# EAGLE board cert3d_rev2_rounded (EAGLE 9.4.1)
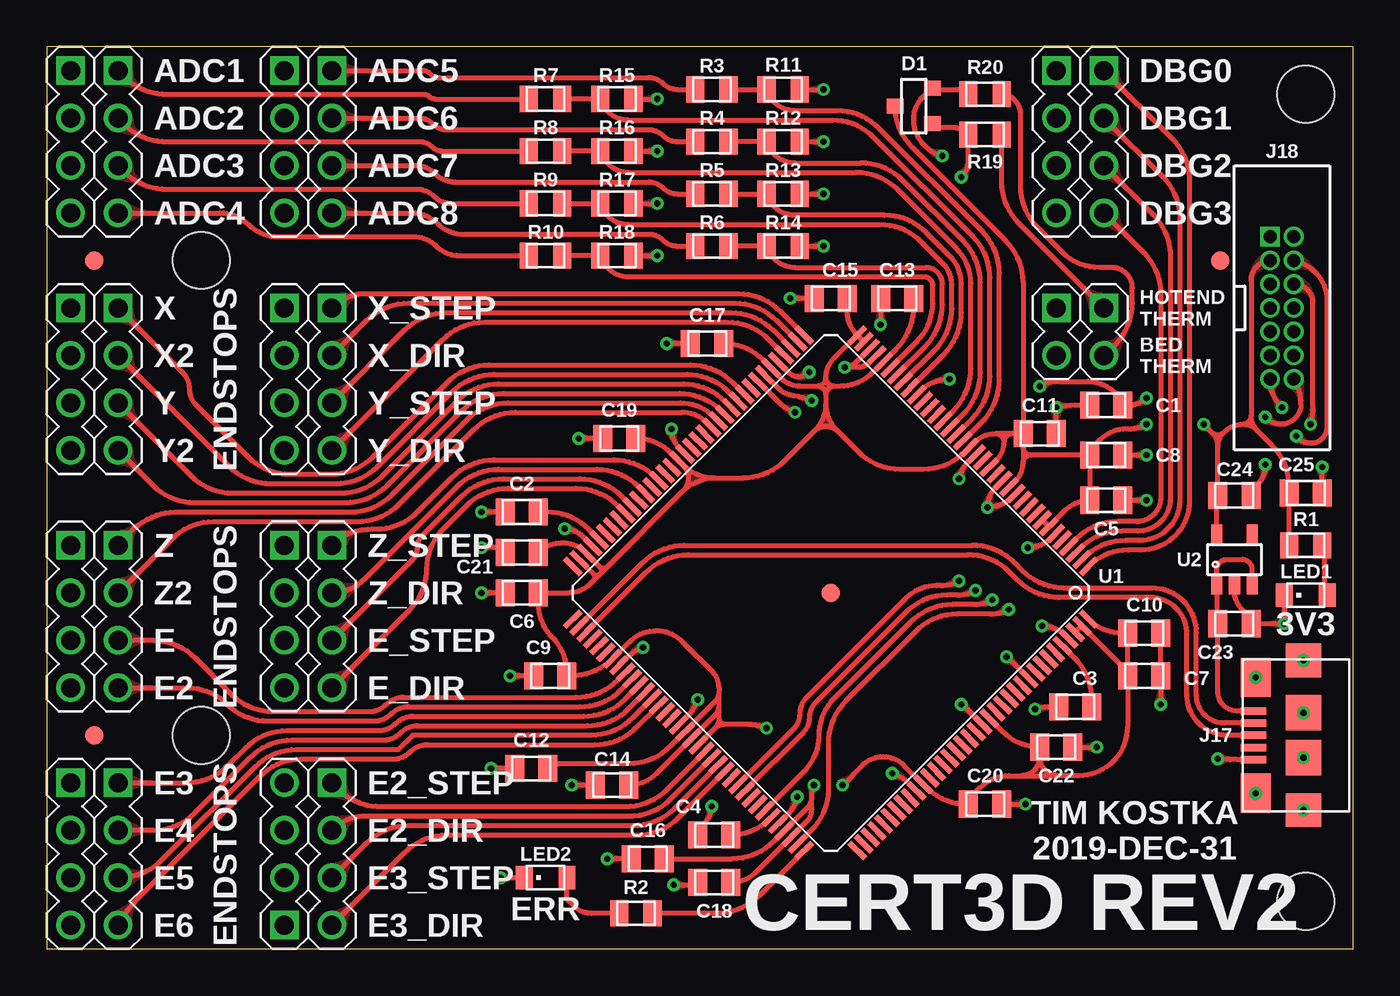
[diagram p0: board, top side]
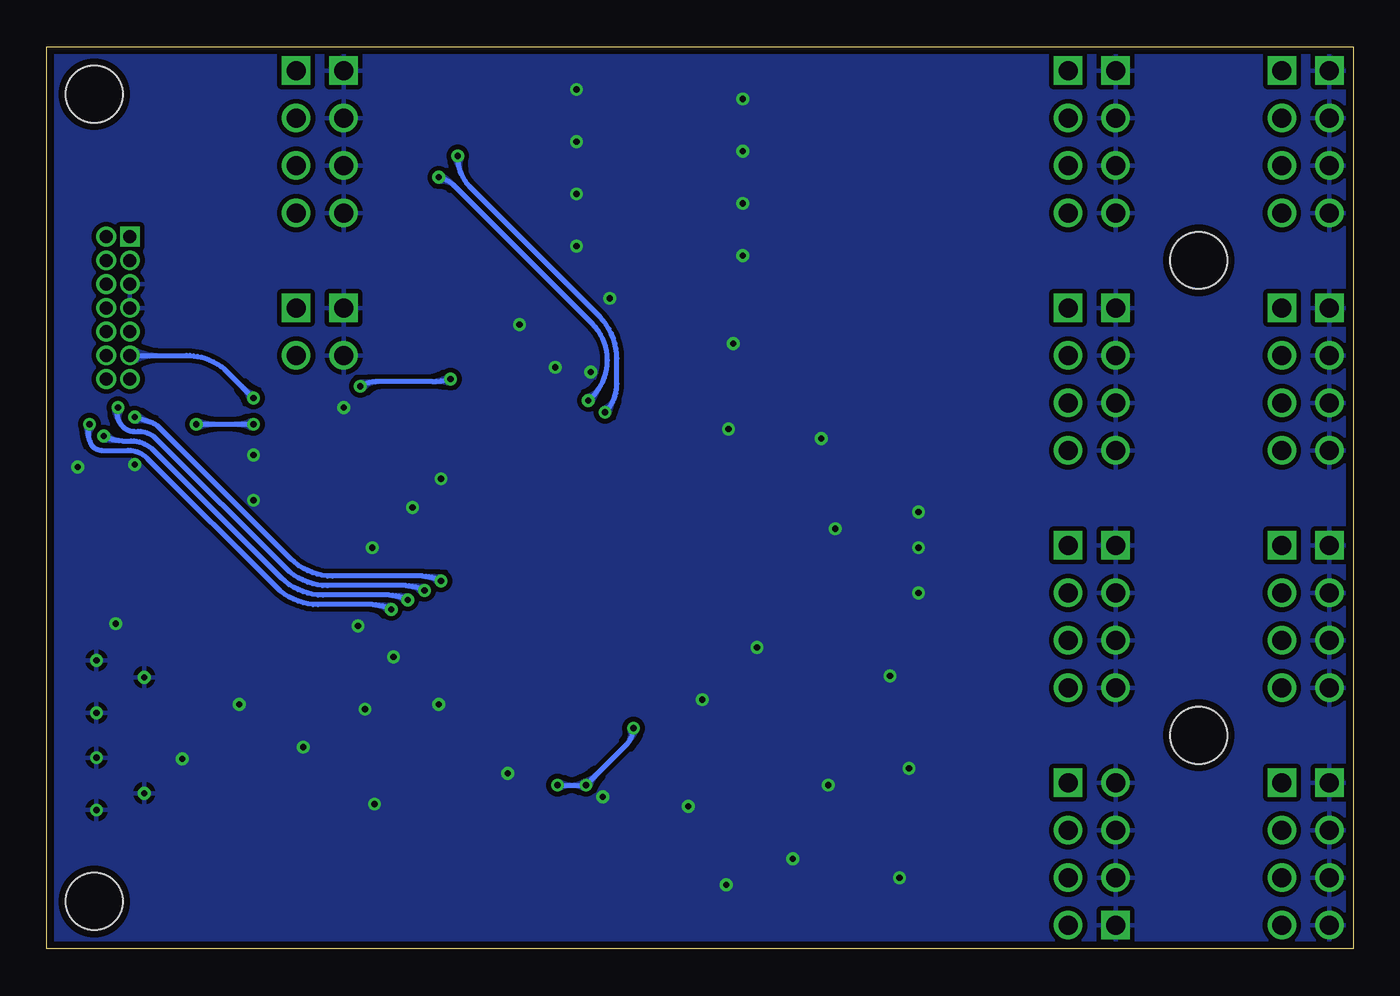
[diagram p1: board, bottom side, seen from below]

Size 69.85 x 48.26 mm. Coordinates in mm from the lower left corner, seen from the top.
Outline: 0,0 69.85,0 69.85,48.26 0,48.26 0,0
Copper layers (1*16): Top 0.0356mm / dielectric 1.5011mm / Bottom 0.0356mm
Design rules "oshpark-2layer *": minimum track width 6mil, minimum drill 13mil, track to track 6mil, track to pad 6mil, pad to pad 6mil, via to via 6mil, smd to smd 6mil, copper to edge 15mil, drill to drill 6mil, minimum pad ring 7mil, minimum via ring 7mil, stop-mask expansion 4mil, vias tented up to drill 13mil, thermal gap 10mil
Net classes: 0 default: width 0.254 mm
Holes 3.05 mm at 8.26,36.83 8.26,11.43 67.31,2.54 67.31,45.72

## Footprints (pad centres in the part's own frame; a part is rotated, then mirrored left to right if it is on the bottom)
C0805-5MIL = smd 1.016 x 1.448: 1 -0.889,0; 2 0.889,0
SOT23-3 = smd 0.9 x 0.8: 1 -1,0.95; 2 -1,-0.95; 3 1,0
FID1MM = smd 1 x 1: 1 0,0
SAM-TSW-104-XX-X-S = drill 1.016 square: 1 -3.81,0 | drill 1.016: 2 -1.27,0; 3 1.27,0; 4 3.81,0
HIR-ZX62R-B-5P-VIAS = smd 0.4 x 1.35: 1 -1.3,0; 2 -0.65,0; 3 0,0; 4 0.65,0; 5 1.3,0 | smd 2.1 x 1.6: PAD@1 3.1,0.125; PAD@2 -3.1,0.125 | smd 1.8 x 1.9: PAD@3 4,2.675; PAD@4 -4,2.675 | smd 1.9 x 1.9: PAD@5 1.2,2.675; PAD@6 -1.2,2.675 | drill 0.33: PAD@7 -3.1,0.125; PAD@8 -4,2.675; PAD@9 -1.2,2.675; PAD@10 1.2,2.675; PAD@11 4,2.675; PAD@12 3.1,0.125
CNC-3220-14-0100-00 = drill 0.7 square: 1 -0.635,3.81 | drill 0.7: 2 0.635,3.81; 3 -0.635,2.54; 4 0.635,2.54; 5 -0.635,1.27; 6 0.635,1.27; 7 -0.635,0; 8 0.635,0; 9 -0.635,-1.27; 10 0.635,-1.27; 11 -0.635,-2.54; 12 0.635,-2.54; 13 -0.635,-3.81; 14 0.635,-3.81
SAM-TSW-102-XX-X-S = drill 1.016 square: 1 -1.27,0 | drill 1.016: 2 1.27,0
CHIPLED0805-SMALL = smd 0.9 x 1.25: A 1.143,0; C -1.143,0
RES0805R-5MIL = smd 0.965 x 1.4: 1 -0.889,0; 2 0.889,0
LQFP144-20X20MM = smd 1.2 x 0.3: 1 -10.75,8.75; 2 -10.75,8.25; 3 -10.75,7.75; 4 -10.75,7.25; 5 -10.75,6.75; 6 -10.75,6.25; 7 -10.75,5.75; 8 -10.75,5.25; 9 -10.75,4.75; 10 -10.75,4.25; 11 -10.75,3.75; 12 -10.75,3.25; 13 -10.75,2.75; 14 -10.75,2.25; 15 -10.75,1.75; 16 -10.75,1.25; 17 -10.75,0.75; 18 -10.75,0.25; 19 -10.75,-0.25; 20 -10.75,-0.75; 21 -10.75,-1.25; 22 -10.75,-1.75; 23 -10.75,-2.25; 24 -10.75,-2.75; 25 -10.75,-3.25; 26 -10.75,-3.75; 27 -10.75,-4.25; 28 -10.75,-4.75; 29 -10.75,-5.25; 30 -10.75,-5.75; 31 -10.75,-6.25; 32 -10.75,-6.75; 33 -10.75,-7.25; 34 -10.75,-7.75; 35 -10.75,-8.25; 36 -10.75,-8.75; 73 10.75,-8.75; 74 10.75,-8.25; 75 10.75,-7.75; 76 10.75,-7.25; 77 10.75,-6.75; 78 10.75,-6.25; 79 10.75,-5.75; 80 10.75,-5.25; 81 10.75,-4.75; 82 10.75,-4.25; 83 10.75,-3.75; 84 10.75,-3.25; 85 10.75,-2.75; 86 10.75,-2.25; 87 10.75,-1.75; 88 10.75,-1.25; 89 10.75,-0.75; 90 10.75,-0.25; 91 10.75,0.25; 92 10.75,0.75; 93 10.75,1.25; 94 10.75,1.75; 95 10.75,2.25; 96 10.75,2.75; 97 10.75,3.25; 98 10.75,3.75; 99 10.75,4.25; 100 10.75,4.75; 101 10.75,5.25; 102 10.75,5.75; 103 10.75,6.25; 104 10.75,6.75; 105 10.75,7.25; 106 10.75,7.75; 107 10.75,8.25; 108 10.75,8.75 | smd 0.3 x 1.2: 37 -8.75,-10.75; 38 -8.25,-10.75; 39 -7.75,-10.75; 40 -7.25,-10.75; 41 -6.75,-10.75; 42 -6.25,-10.75; 43 -5.75,-10.75; 44 -5.25,-10.75; 45 -4.75,-10.75; 46 -4.25,-10.75; 47 -3.75,-10.75; 48 -3.25,-10.75; 49 -2.75,-10.75; 50 -2.25,-10.75; 51 -1.75,-10.75; 52 -1.25,-10.75; 53 -0.75,-10.75; 54 -0.25,-10.75; 55 0.25,-10.75; 56 0.75,-10.75; 57 1.25,-10.75; 58 1.75,-10.75; 59 2.25,-10.75; 60 2.75,-10.75; 61 3.25,-10.75; 62 3.75,-10.75; 63 4.25,-10.75; 64 4.75,-10.75; 65 5.25,-10.75; 66 5.75,-10.75; 67 6.25,-10.75; 68 6.75,-10.75; 69 7.25,-10.75; 70 7.75,-10.75; 71 8.25,-10.75; 72 8.75,-10.75; 109 8.75,10.75; 110 8.25,10.75; 111 7.75,10.75; 112 7.25,10.75; 113 6.75,10.75; 114 6.25,10.75; 115 5.75,10.75; 116 5.25,10.75; 117 4.75,10.75; 118 4.25,10.75; 119 3.75,10.75; 120 3.25,10.75; 121 2.75,10.75; 122 2.25,10.75; 123 1.75,10.75; 124 1.25,10.75; 125 0.75,10.75; 126 0.25,10.75; 127 -0.25,10.75; 128 -0.75,10.75; 129 -1.25,10.75; 130 -1.75,10.75; 131 -2.25,10.75; 132 -2.75,10.75; 133 -3.25,10.75; 134 -3.75,10.75; 135 -4.25,10.75; 136 -4.75,10.75; 137 -5.25,10.75; 138 -5.75,10.75; 139 -6.25,10.75; 140 -6.75,10.75; 141 -7.25,10.75; 142 -7.75,10.75; 143 -8.25,10.75; 144 -8.75,10.75
SOT23-5 = smd 1.05 x 0.6: 1 -1.35,0.95; 2 -1.35,0; 3 -1.35,-0.95; 4 1.35,-0.95; 5 1.35,0.95

## Placement (x,y rotation side)
C1  0.1uF  [C0805-5MIL]  56.64,29.08 180 top
C2  2.2uF  [C0805-5MIL]  25.4,23.37 180 top
C3  2.2uF  [C0805-5MIL]  54.99,12.95 180 top
C4  2.2uF  [C0805-5MIL]  35.69,6.1 180 top
C5  0.1uF  [C0805-5MIL]  56.64,24 0 top
C6  0.1uF  [C0805-5MIL]  25.4,19.05 180 top
C7  0.1uF  [C0805-5MIL]  58.67,14.61 0 top
C8  0.1uF  [C0805-5MIL]  56.64,26.42 0 top
C9  0.1uF  [C0805-5MIL]  26.92,14.61 180 top
C10  0.1uF  [C0805-5MIL]  58.67,16.89 0 top
C11  0.1uF  [C0805-5MIL]  53.09,27.56 0 top
C12  0.1uF  [C0805-5MIL]  25.91,9.65 180 top
C13  0.1uF  [C0805-5MIL]  45.47,34.8 180 top
C14  0.1uF  [C0805-5MIL]  30.23,8.76 180 top
C15  0.1uF  [C0805-5MIL]  41.91,34.8 180 top
C16  0.1uF  [C0805-5MIL]  32.13,4.83 180 top
C17  0.1uF  [C0805-5MIL]  35.31,32.38 180 top
C18  0.1uF  [C0805-5MIL]  35.69,3.56 180 top
C19  0.1uF  [C0805-5MIL]  30.61,27.3 180 top
C20  0.1uF  [C0805-5MIL]  50.16,7.75 0 top
C21  0.1uF  [C0805-5MIL]  25.4,21.21 180 top
C22  0.1uF  [C0805-5MIL]  53.98,10.79 0 top
C23  2.2uF  [C0805-5MIL]  63.5,17.4 0 top
C24  2.2uF  [C0805-5MIL]  63.5,24.26 0 top
C25  0.1uF  [C0805-5MIL]  67.31,24.38 0 top
D1  SCHOTTKY_DUAL_CCBAT54C  [SOT23-3]  46.35,45.09 180 top
FD1  FIDUCIAL  [FID1MM]  2.54,36.83 0 top
FD2  FIDUCIAL  [FID1MM]  41.91,19.05 0 top
FD3  FIDUCIAL  [FID1MM]  62.74,36.83 0 top
FD4  FIDUCIAL  [FID1MM]  2.54,11.43 0 top
J1  CONN4TSW-S  [SAM-TSW-104-XX-X-S]  3.81,30.48 270 top
J2  CONN4TSW-S  [SAM-TSW-104-XX-X-S]  3.81,17.78 270 top
J3  CONN4TSW-S  [SAM-TSW-104-XX-X-S]  3.81,5.08 270 top
J4  CONN4TSW-S  [SAM-TSW-104-XX-X-S]  1.27,30.48 270 top
J5  CONN4TSW-S  [SAM-TSW-104-XX-X-S]  1.27,17.78 270 top
J6  CONN4TSW-S  [SAM-TSW-104-XX-X-S]  1.27,5.08 270 top
J7  CONN4TSW-S  [SAM-TSW-104-XX-X-S]  15.24,43.18 270 top
J8  CONN4TSW-S  [SAM-TSW-104-XX-X-S]  3.81,43.18 270 top
J9  CONN4TSW-S  [SAM-TSW-104-XX-X-S]  15.24,17.78 270 top
J10  CONN4TSW-S  [SAM-TSW-104-XX-X-S]  15.24,30.48 270 top
J11  CONN4TSW-S  [SAM-TSW-104-XX-X-S]  15.24,5.08 270 top
J12  CONN4TSW-S  [SAM-TSW-104-XX-X-S]  1.27,43.18 270 top
J13  CONN4TSW-S  [SAM-TSW-104-XX-X-S]  12.7,43.18 270 top
J14  CONN4TSW-S  [SAM-TSW-104-XX-X-S]  12.7,17.78 270 top
J15  CONN4TSW-S  [SAM-TSW-104-XX-X-S]  12.7,30.48 270 top
J16  CONN4TSW-S  [SAM-TSW-104-XX-X-S]  12.7,5.08 90 top
J17  USB-5PINTOPVIA  [HIR-ZX62R-B-5P-VIAS]  64.52,11.43 270 top
J18  STLINK-V3/SWDCNC-3220  [CNC-3220-14-0100-00]  66.04,34.29 0 top
J19  CONN2TSW-S  [SAM-TSW-102-XX-X-S]  56.52,33.02 270 top
J20  CONN2TSW-S  [SAM-TSW-102-XX-X-S]  53.98,33.02 270 top
J21  CONN4TSW-S  [SAM-TSW-104-XX-X-S]  56.52,43.18 270 top
J22  CONN4TSW-S  [SAM-TSW-104-XX-X-S]  53.98,43.18 270 top
LED1  GRN  [CHIPLED0805-SMALL]  67.31,18.92 0 top
LED2  RED  [CHIPLED0805-SMALL]  26.67,3.81 0 top
R1  100K  [RES0805R-5MIL]  67.31,21.59 0 top
R2  10K  [RES0805R-5MIL]  31.5,1.91 180 top
R3  7.5K  [RES0805R-5MIL]  35.56,45.97 180 top
R4  7.5K  [RES0805R-5MIL]  35.56,43.18 180 top
R5  7.5K  [RES0805R-5MIL]  35.56,40.39 180 top
R6  7.5K  [RES0805R-5MIL]  35.56,37.59 180 top
R7  7.5K  [RES0805R-5MIL]  26.67,45.47 180 top
R8  7.5K  [RES0805R-5MIL]  26.67,42.67 180 top
R9  7.5K  [RES0805R-5MIL]  26.67,39.88 180 top
R10  7.5K  [RES0805R-5MIL]  26.67,37.08 180 top
R11  1.0K  [RES0805R-5MIL]  39.37,45.97 0 top
R12  1.0K  [RES0805R-5MIL]  39.37,43.18 0 top
R13  1.0K  [RES0805R-5MIL]  39.37,40.39 0 top
R14  1.0K  [RES0805R-5MIL]  39.37,37.59 0 top
R15  1.0K  [RES0805R-5MIL]  30.48,45.47 0 top
R16  1.0K  [RES0805R-5MIL]  30.48,42.67 0 top
R17  1.0K  [RES0805R-5MIL]  30.48,39.88 0 top
R18  1.0K  [RES0805R-5MIL]  30.48,37.08 0 top
R19  100  [RES0805R-5MIL]  50.16,43.56 0 top
R20  100  [RES0805R-5MIL]  50.16,45.72 0 top
U1  STM32H745-144  [LQFP144-20X20MM]  41.91,19.05 225 top
U2  MIC5219  [SOT23-5]  63.5,20.83 90 top

## Library data of the parts
C1 C5-C22 C25 = kcl_passives; PN: C0805C104K5RACTU
C2-C4 = kcl_passives; PN: C0805C225K3RAC7800
C23 C24 = kcl_passives; PN: C0805C225K8RACTU
D1 = kcl_passives; PN: BAT54CLT1G
FD1-FD4 = kcl_extra; PN: DNI
J1-J16 J21 J22 = kcl_connectors_auto; PN: TSW-104-07-F-S
J17 = kcl_connectors; PN: ZX62R-B-5P(30)
J18 = kcl_connectors; PN: 3220-14-0100-00
J19 J20 = kcl_connectors_auto; PN: TSW-102-07-F-S
LED1 = kcl_passives; PN: 150080GS75000
LED2 = kcl_passives; PN: 150080RS75000
R1 = kcl_passives; PN: CRCW0805100KFKEA
R2 = kcl_passives; PN: CRCW080510K0FKEA
R3-R10 = kcl_passives; PN: CRCW08057K50FKEA
R11-R18 = kcl_passives; PN: CRCW08051K00FKEA
R19 R20 = kcl_passives; PN: CRCW0805100RFKEA
U1 = kcl_ics
U2 = kcl_ics; PN: MIC5323-3.3YD5-TR

## Nets
+3V3: C5.1 C6.1 C7.1 C8.1 C9.1 C10.1 C11.1 C12.1 C13.1 C14.1 C15.1 C16.1 C17.1 C18.1 C19.1 C20.1 C21.1 C22.1 C24.1 C25.1 D1.3 J18.3 R1.1 U1.7 U1.8 U1.13 U1.16 U1.19 U1.32 U1.35 U1.36 U1.42 U1.56 U1.70 U1.71 U1.79 U1.90 U1.91 U1.92 U1.105 U1.106 U1.119 U1.129 U1.142 U1.143 U1.144 U2.5
ADC3_INP0: R6.1 R14.1 U1.30
ADC3_INP1: R10.1 R18.1 U1.31
ADC3_INP2: R8.1 R16.1 U1.23
ADC3_INP3: R7.1 R15.1 U1.21
ADC3_INP7: R4.1 R12.1 U1.22
ADC3_INP8: R3.1 R11.1 U1.20
ADC3_INP10: R5.1 R13.1 U1.28
ADC3_INP11: R9.1 R17.1 U1.29
DAC1_OUT1: D1.1 R19.1 U1.43
DAC1_OUT2: D1.2 R20.1 U1.44
DEBUG0: J21.1 U1.1
DEBUG1: J21.2 U1.2
DEBUG2: J21.3 U1.3
DEBUG3: J21.4 U1.4
E2_STOP: J2.4 U1.82
E3_STOP: J3.1 U1.83
E4_STOP: J3.2 U1.84
E5_STOP: J3.3 U1.85
E6_STOP: J3.4 U1.86
E_STOP: J2.3 U1.81
GND: C1.2 C2.2 C3.2 C4.2 C5.2 C6.2 C7.2 C8.2 C9.2 C10.2 C11.2 C12.2 C13.2 C14.2 C15.2 C16.2 C17.2 C18.2 C19.2 C20.2 C21.2 C22.2 C23.2 C24.2 C25.2 J4.1 J4.2 J4.3 J4.4 J5.1 J5.2 J5.3 J5.4 J6.1 J6.2 J6.3 J6.4 J12.1 J12.2 J12.3 J12.4 J13.1 J13.2 J13.3 J13.4 J14.1 J14.2 J14.3 J14.4 J15.1 J15.2 J15.3 J15.4 J16.1 J16.2 J16.3 J16.4 J17.5 J17.PAD@1 J17.PAD@2 J17.PAD@3 J17.PAD@4 J17.PAD@5 J17.PAD@6 J17.PAD@7 J17.PAD@8 J17.PAD@9 J17.PAD@10 J17.PAD@11 J17.PAD@12 J18.5 J18.7 J20.1 J20.2 J22.1 J22.2 J22.3 J22.4 LED1.C LED2.C R11.2 R12.2 R13.2 R14.2 R15.2 R16.2 R17.2 R18.2 U1.6 U1.12 U1.14 U1.18 U1.33 U1.34 U1.41 U1.55 U1.69 U1.80 U1.89 U1.104 U1.118 U1.128 U1.135 U1.141 U2.2
LED_ERR: R2.1 U1.108
N$1: C2.1 U1.68
N$2: C4.1 U1.103
N$3: J7.3 R5.2
N$5: J7.1 R3.2
N$6: J8.2 R8.2
N$7: J7.2 R4.2
N$9: C3.1 U1.140
N$10: C23.1 J17.1 U2.1 U2.3
N$13: J8.3 R9.2
N$14: J7.4 R6.2
N$15: J8.4 R10.2
N$16: J8.1 R7.2
N$23: LED2.A R2.2
N$24: LED1.A R1.2
NRST: C1.1 J18.11 U1.27
SWCLK: J18.6 U1.107
SWDIO: J18.4 U1.102
THERM_BED: J19.2 R20.2
THERM_HOT_END: J19.1 R19.2
TIM1_CH1: J9.1 U1.59
TIM1_CH2: J9.2 U1.61
TIM1_CH3: J9.3 U1.63
TIM1_CH4: J9.4 U1.64
TIM2_CH1: J10.1 U1.37
TIM2_CH2: J10.2 U1.38
TIM2_CH3: J10.3 U1.39
TIM2_CH4: J10.4 U1.40
TIM3_CH1: J11.1 U1.93
TIM3_CH2: J11.2 U1.94
TIM3_CH3: J11.3 U1.95
TIM3_CH4: J11.4 U1.96
USART1_RX: J18.13 U1.99
USART1_TX: J18.14 U1.98
USB_HS_DM: J17.2 U1.74
USB_HS_DP: J17.3 U1.75
X2_STOP: J1.2 U1.47
X_STOP: J1.1 U1.46
Y2_STOP: J1.4 U1.49
Y_STOP: J1.3 U1.48
Z2_STOP: J2.2 U1.51
Z_STOP: J2.1 U1.50

## Tracks (layer width: path | path; a pad name or v marks a point on that pad's centre or on a via)
+3V3  (via drill 0.33)
  Top 0.254: 62.28,27.64 v61.85,28.07 | v42.55,8.76 43.61,9.83 arc-45 44.72,10.29 arc-45 45.83,9.83 U1.119 46.99,8.67 arc45 49.21,7.75 C20.1 arc-45 49.46,8.18 49.91,8.64 arc-45 51.44,9.27 52.09,9.27 | J18.3 arc81 64.39,35.84 arc5 64.39,35.75 64.39,28.51 | v38.48,11.81 arc24 37.49,12.02 36.25,12.02 | 40.89,8.13 arc-23 v41.02,8.76 | v58.8,28.07 arc-29 57.82,27.81 57.7,27.81 arc45 56.33,27.24 55.93,26.85 arc45 C8.1 | C11.1 51.62,27.56 | 50.74,27.56 50.7,27.56 arc45 49.62,27.11 U1.19 49.08,26.57 arc-45 46.86,25.65 45.62,25.65 arc-45 43.4,26.57 42.28,27.69 | U1.35 U1.36 | C16.1 36.64,4.83 arc45 38.86,5.75 U1.105 40.64,7.53 | U1.129 51.12,11.61 arc45 C22.1 53.09,10.27 | C15.1 42.8,34.11 arc45 U1.36 | C13.1 46.35,34.34 arc-45 45.44,32.12 U1.32 44.12,30.8 arc-45 42.42,30.1 42.12,30.1 | 29.23,19.71 29.05,19.52 arc-45 27.91,19.05 C6.1 26.29,18.48 arc45 27.05,16.64 arc-45 27.81,14.8 C9.1 28.05,14.61 arc45 U1.79 31.16,16.43 arc-45 32.57,17.02 arc-45 33.99,16.43 35.57,14.85 arc-45 35.94,13.96 35.94,13.79 | U1.16 50.78,26.15 arc45 51.18,27.12 | R1.1 C25.1 66.42,24.73 arc45 65.5,26.95 64.7,27.76 | U1.71 29.23,20.06 | 29.59,20.41 U1.70 28.81,21.19 arc45 27.54,21.72 27.52,21.72 arc45 C21.1 | 29.94,20.41 34.01,24.48 | 34.01,25.89 U1.56 33.37,26.53 arc45 C19.1 | 35.69,13.19 U1.90 33.33,10.82 arc-45 31.11,9.91 27.41,9.91 arc45 C12.1 | 35.69,12.48 U1.91 32.59,9.37 arc-45 C14.1 | U1.92 35.72,11.8 | 35.94,12.33 35.94,12.37 | U2.5 62.55,24.11 arc-45 C24.1 62.61,26.84 | C7.1 C10.1 57.5,16.89 arc-45 U1.144 | C7.1 57.78,11.87 arc-45 57.02,10.03 arc-45 55.18,9.27 54.08,9.27 | U1.36 42.09,31.6 arc45 41.66,30.56
  Top 0.254: 41.19,30.1 40.3,30.1 arc-45 39.27,30.52 U1.42 38.28,31.52 arc45 C17.1 | 41.66,29.64 41.66,29.21 | 41.03,27.69 39.44,26.11 arc-45 37.22,25.19 35.71,25.19 | U1.8 U1.7 54.46,23.47 arc-45 C5.1 C8.1 | U1.142 U1.143 57.62,15.01 arc-45 C7.1 | 62.94,27.64 62.97,27.66 arc-45 63.95,28.07 | U1.13 51.81,25.06 arc45 52.2,26 | 52.2,26.84 C11.1 | C8.1 52.62,26.42 | C11.1 52.2,35.66 arc45 51.28,37.88 46.26,42.89 arc-45 D1.3 | 40.89,7.43 arc-45 40.64,6.82 U1.106 37.94,4.12 arc-45 C18.1 | 41.66,29.64 arc-90 42.12,30.1 | 42.12,30.1 arc-90 41.66,30.56 | 41.66,30.56 arc-90 41.19,30.1 | 41.19,30.1 arc-90 41.66,29.64 | 52.2,26 arc-90 52.62,26.42 | 52.62,26.42 arc-90 52.2,26.84 | 52.2,26.84 52.2,26 | 41.03,27.69 arc-90 42.28,27.69 | 42.28,27.69 arc-45 41.66,29.21 | 41.66,29.21 arc-45 41.03,27.69 | 62.61,26.84 arc-45 62.94,27.64 | 62.94,27.64 arc-90 62.28,27.64 | 62.28,27.64 arc-45 62.61,26.84 | 51.18,27.12 arc-90 51.62,27.56 | 51.62,27.56 50.74,27.56 | 50.74,27.56 arc-90 51.18,27.12 | 29.23,19.71 29.59,20.06 | 29.59,20.06 arc-90 29.23,20.06 | 29.23,20.06 arc-90 29.23,19.71 | 35.69,13.19 arc-135 35.94,13.08 | 35.94,13.08 35.94,13.79 | 35.94,13.79 arc-45 35.69,13.19 | 64.7,27.76 arc-45 64.39,28.51 | 64.39,28.51 arc-90 63.95,28.07 | 63.95,28.07 arc-45 64.7,27.76 | 35.69,12.48 arc-135 35.94,12.37 | 35.94,12.37 35.94,13.08 | 35.94,13.08 arc-45 35.69,12.48 | 35.72,11.8 arc-45 36.25,12.02 | 36.25,12.02 arc-90 35.94,12.33 | 35.94,12.33 arc-45 35.72,11.8 | 54.08,9.27 arc-90 53.09,10.27 | 53.09,10.27 arc-90 52.09,9.27 | 52.09,9.27 54.08,9.27 | 29.59,20.06 29.94,20.41 | 29.94,20.41 arc-90 29.59,20.41 | 29.59,20.41 arc-90 29.59,20.06 | 34.01,24.48 arc-45 35.71,25.19
  Top 0.254: 35.71,25.19 arc-45 34.01,25.89 | 34.01,25.89 arc-90 34.01,24.48 | 40.64,7.53 arc-135 40.89,7.43 | 40.89,7.43 40.89,8.13 | 40.89,8.13 arc-45 40.64,7.53
  Bottom 0.254: v61.85,28.07 v58.8,28.07 | v42.55,8.76 v41.02,8.76 38.9,10.88 arc-41 v38.48,11.81
  pour Top (no thermals): 41.66,29.63 arc-90 42.12,30.1 arc-90 41.66,30.56 arc-90 41.19,30.1 arc-90
  pour Top (no thermals): 52.2,26 arc-90 52.62,26.42 arc-90 52.2,26.84
  pour Top (no thermals): 41.03,27.69 arc-90 42.28,27.69 arc-45 41.66,29.21 arc-45
  pour Top (no thermals): 62.61,26.84 arc-45 62.94,27.64 arc-90 62.28,27.64 arc-45
  pour Top (no thermals): 51.18,27.12 arc-90 51.62,27.56 50.75,27.56 arc-90
  pour Top (no thermals): 29.23,19.71 29.59,20.06 arc-90 29.23,20.06 arc-90
  pour Top (no thermals): 35.69,13.18 arc-135 35.94,13.08 35.94,13.79 arc-45
  pour Top (no thermals): 64.7,27.76 arc-45 64.39,28.51 arc-90 63.95,28.07 arc-45
  pour Top (no thermals): 35.69,12.48 arc-135 35.94,12.37 35.94,13.08 arc-45
  pour Top (no thermals): 35.72,11.8 arc-45 36.25,12.02 arc-90 35.94,12.33 arc-45
  pour Top (no thermals): 54.08,9.27 arc-90 53.09,10.27 arc-90 52.09,9.27
  pour Top (no thermals): 29.59,20.06 29.94,20.41 arc-90 29.59,20.41 arc-90
  pour Top (no thermals): 34.01,24.48 arc-45 35.71,25.19 arc-45 34.01,25.89 arc-90
  pour Top (no thermals): 40.64,7.53 arc-135 40.89,7.43 40.89,8.13 arc-45
  pour Top (no thermals): 62.28,27.64 arc39 61.83,27.85 61.85,28.07 62.06,28.09 arc39
  pour Bottom (no thermals): 60.83,28.07 arc24 61.76,28.26 61.85,28.07 61.76,27.87 arc24
  pour Bottom (no thermals): 59.82,28.07 arc24 58.89,27.87 58.8,28.07 58.89,28.26 arc24
  pour Bottom (no thermals): 41.78,8.76 arc32 42.43,8.95 42.55,8.76 42.43,8.58 arc32
  pour Bottom (no thermals): 41.78,8.76 arc32 41.13,8.58 41.02,8.76 41.13,8.95 arc32
  pour Top (no thermals): 43.26,9.48 arc24 42.75,8.69 42.55,8.76 42.47,8.96 arc24
  pour Bottom (no thermals): 40.3,9.48 arc24 41.1,8.96 41.02,8.76 40.82,8.69 arc24
  pour Top (no thermals): 64.39,35.85 arc-51 65.18,37.16 65.41,36.83 65.29,36.45 arc102
  pour Top (no thermals): 37.49,12.02 arc1 38.48,12.03 38.48,11.81 38.32,11.66 arc46
  pour Bottom (no thermals): 38.9,10.88 arc-17 38.29,11.71 38.48,11.81 38.69,11.75 arc62
  pour Top (no thermals): 40.89,8.13 arc16 40.81,8.7 41.02,8.76 41.14,8.58 arc57
  pour Top (no thermals): 57.82,27.81 arc51 58.63,28.2 58.8,28.07 58.82,27.85 arc-4
ADC3_INP0
  Top 0.254: U1.30 46.96,32.23 arc45 47.88,34.45 47.88,35.58 arc45 47.62,36.2 arc45 47.01,36.45 40,36.45 arc-45 38.92,36.89 38.66,37.16 arc-45 R14.1 R6.1
ADC3_INP1
  Top 0.254: U1.31 46.55,32.52 arc45 47.37,34.52 47.37,35.51 arc45 47.24,35.81 arc45 46.94,35.94 31.11,35.94 arc-45 30.04,36.39 29.77,36.65 arc-45 R18.1 R10.1
ADC3_INP2
  Top 0.254: U1.23 48.48,28.81 arc45 49.4,31.02 49.4,35.6 arc45 48.63,37.48 45.5,40.61 arc45 43.28,41.53 31.11,41.53 arc-45 30.04,41.97 29.77,42.24 arc-45 R16.1 R8.1
ADC3_INP3
  Top 0.254: U1.21 49.5,28.41 arc45 50.42,30.63 50.42,35.91 arc45 49.5,38.13 44.23,43.4 arc45 42.01,44.32 31.11,44.32 arc-45 30.04,44.77 29.77,45.03 arc-45 R15.1 R7.1
ADC3_INP7
  Top 0.254: U1.22 48.99,28.61 arc45 49.91,30.83 49.91,35.66 arc45 48.99,37.88 45.75,41.12 arc45 43.53,42.04 40,42.04 arc-45 38.92,42.48 38.66,42.75 arc-45 R12.1 R4.1
ADC3_INP8
  Top 0.254: U1.20 50.01,28.21 arc45 50.93,30.43 50.93,36.16 arc45 50.01,38.38 44.48,43.91 arc45 42.26,44.83 40,44.83 arc-45 38.92,45.28 38.66,45.54 arc-45 R11.1 R3.1
ADC3_INP10
  Top 0.254: U1.28 47.98,31.83 arc45 48.9,34.05 48.9,35.6 arc45 48.3,37.05 47.02,38.32 arc45 44.8,39.24 40,39.24 arc-45 38.92,39.69 38.66,39.95 arc-45 R13.1 R5.1
ADC3_INP11
  Top 0.254: U1.29 47.47,32.03 arc45 48.39,34.25 48.39,35.53 arc45 47.92,36.66 46.77,37.82 arc45 44.55,38.73 31.11,38.73 arc-45 30.04,39.18 29.77,39.44 arc-45 R17.1 R9.1
DAC1_OUT1  (via drill 0.33)
  Top 0.254: v40.89,29.34 arc17 39.91,29.6 arc-38 39.1,29.99 U1.43 | v48.9,41.27 arc44 49.28,42.22 R19.1 arc45 48.36,43.94 47.82,43.94 arc-45 D1.1
  Bottom 0.254: v40.89,29.34 arc-19 40.25,30.12 arc-30 39.88,31.5 arc-45 40.69,33.45 48.01,40.77 arc-31 v48.9,41.27
  pour Bottom (no thermals): 40.25,30.12 arc42 40.96,29.54 40.89,29.34 40.7,29.25 arc5
  pour Top (no thermals): 39.91,29.6 arc8 40.89,29.55 40.89,29.34 40.74,29.19 arc40
  pour Bottom (no thermals): 48.01,40.77 arc-6 48.76,41.44 48.9,41.27 48.87,41.06 arc53
  pour Top (no thermals): 49.28,42.22 arc-20 49.1,41.2 48.9,41.27 48.8,41.47 arc65
DAC1_OUT2  (via drill 0.33)
  Top 0.254: v47.88,42.42 arc-31 46.99,42.92 46.89,43.02 arc-45 46.35,44.32 46.35,44.41 arc-45 46.83,45.56 47.3,46.03 D1.2 arc45 47.5,45.97 48.66,45.97 arc-45 R20.1 | v40.01,28.7 arc-26 39.14,29.24 U1.44
  Bottom 0.254: v47.88,42.42 arc-24 47.67,41.42 arc-21 47.16,40.68 40.29,33.81 arc45 39.37,31.59 39.37,30.23 arc18 39.48,29.57 arc27 v40.01,28.7
  pour Top (no thermals): 47,42.92 arc53 47.85,42.63 47.88,42.42 47.74,42.25 arc-6
  pour Bottom (no thermals): 47.67,41.42 arc46 47.68,42.34 47.88,42.42 48.08,42.33 arc1
  pour Top (no thermals): 39.14,29.24 arc48 39.99,28.92 40.01,28.7 39.86,28.55 arc-1
  pour Bottom (no thermals): 39.47,29.57 arc49 40.09,28.9 40.01,28.7 39.8,28.63 arc-3
DEBUG0
  Top 0.254: J21.1 60.17,43.34 arc-45 61.09,41.12 61.09,23.94 arc-45 60.33,22.1 arc-45 58.48,21.34 57.8,21.34 arc45 U1.1
  pour Top (no thermals): 57.8,45.7 arc38 56.44,46.36 56.52,46.99 57.15,47.06 arc38
DEBUG1
  Top 0.254: J21.2 59.66,41.3 arc-45 60.58,39.09 60.58,24.01 arc-45 59.94,22.48 arc-45 58.41,21.84 57.67,21.84 arc45 55.45,20.93 U1.2
  pour Top (no thermals): 57.8,43.16 arc38 56.44,43.82 56.52,44.45 57.15,44.52 arc38
DEBUG2
  Top 0.254: J21.3 59.15,39.27 arc-45 60.07,37.05 60.07,24.09 arc-45 59.56,22.86 arc-45 58.34,22.35 57.47,22.35 arc45 55.25,21.43 U1.3
  pour Top (no thermals): 57.8,40.62 arc38 56.44,41.28 56.52,41.91 57.15,41.98 arc38
DEBUG3
  Top 0.254: J21.4 58.64,37.24 arc-45 59.56,35.02 59.56,24.16 arc-45 59.18,23.24 arc-45 58.26,22.86 57.27,22.86 arc45 55.05,21.94 U1.4
  pour Top (no thermals): 57.8,38.08 arc38 56.44,38.74 56.52,39.37 57.15,39.44 arc38
E2_STOP
  Top 0.254: J2.4 7.51,13.97 arc-45 9.65,13.08 arc45 11.8,12.19 17.5,12.19 arc45 18.41,12.57 arc-45 19.34,12.95 28.5,12.95 arc45 30.72,13.87 U1.82
  pour Top (no thermals): 5.63,13.97 arc38 4.21,13.47 3.81,13.97 4.21,14.47 arc38
E3_STOP
  Top 0.254: J3.1 7.46,8.89 arc45 9.68,9.81 10.64,10.77 arc-45 12.86,11.68 17.75,11.68 arc45 18.67,12.06 arc-45 19.59,12.45 28.7,12.45 arc45 30.92,13.37 U1.83
  pour Top (no thermals): 5.63,8.89 arc38 4.21,8.39 3.81,8.89 4.21,9.39 arc38
E4_STOP
  Top 0.254: J3.2 5.68,6.35 arc45 7.9,7.27 10.89,10.26 arc-45 13.11,11.18 18,11.18 arc45 18.92,11.56 arc-45 19.84,11.94 28.9,11.94 arc45 31.12,12.86 U1.84
  pour Top (no thermals): 5.63,6.35 arc38 4.21,5.85 3.81,6.35 4.21,6.85 arc38
E5_STOP
  Top 0.254: J3.3 arc34 5.57,4.28 arc13 6.13,4.73 11.15,9.75 arc-45 13.37,10.67 18.8,10.67 19.56,11.43 29.1,11.43 arc45 31.32,12.35 U1.85
  pour Top (no thermals): 5.57,4.28 arc7 4.21,3.32 3.81,3.81 4.18,4.33 arc67
E6_STOP
  Top 0.254: J3.4 arc-17 4.89,2.73 11.4,9.24 arc-45 13.62,10.16 18.51,10.16 arc45 19.43,10.54 arc-45 20.35,10.92 29.3,10.92 arc45 31.52,11.84 U1.86
  pour Top (no thermals): 4.89,2.73 arc53 4.44,1.36 3.81,1.27 3.57,1.86 arc23
E_STOP
  Top 0.254: J2.3 5.68,16.51 arc-45 7.9,15.59 9.88,13.62 arc45 12.1,12.7 17.24,12.7 arc45 18.16,13.08 arc-45 19.08,13.46 28.3,13.46 arc45 30.52,14.38 U1.81
  pour Top (no thermals): 5.63,16.51 arc38 4.21,16.01 3.81,16.51 4.21,17.01 arc38
GND  (via drill 0.33)
  Top 0.254: R14.2 v41.53,37.59 | R13.2 v41.53,40.39 | R12.2 v41.53,43.18 | R11.2 v41.53,45.97 | R15.2 v32.64,45.47 | R16.2 v32.64,42.67 | R17.2 v32.64,39.88 | R18.2 v32.64,37.08 | C2.2 v23.24,23.37 | v23.24,21.46 arc-40 24.25,21.39 arc-21 C21.2 | C6.2 v23.24,19.05 | C19.2 v28.45,27.3 | C17.2 v33.15,32.38 | C9.2 v24.77,14.61 | C12.2 v23.75,9.65 | C15.2 v39.75,34.8 | v40.77,30.86 arc-86 39.76,30.76 arc-8 39.68,30.82 U1.41 | C8.2 v58.8,26.42 | C5.2 v58.8,24 | C13.2 v44.58,33.4 | C14.2 v28.07,8.76 | C16.2 v29.97,4.83 | v33.53,3.43 arc14 34.55,3.43 arc38 C18.2 | LED2.C v24.26,3.81 | v51.31,15.62 arc-3 52.05,14.92 U1.135 | v48.9,13.08 arc-4 49.64,12.38 U1.128 | v62.61,10.16 arc3 63.63,10.13 J17.5 | C25.2 v68.2,25.78 | v65.15,25.91 arc-46 64.82,24.95 arc-3 64.77,24.89 64.57,24.69 arc45 C24.2 | v59.56,13.08 C7.2 C10.2 | C22.2 v56.13,10.79 | C20.2 v52.32,7.75 | C11.2 v53.98,28.96 arc-14 54.98,29.08 C1.2 | v27.69,22.48 arc-44 28.62,22.08 U1.69 | v52.45,21.46 arc34 53.42,21.76 arc11 53.66,21.97 U1.6 | v40.13,8.13 arc-32 39.64,7.24 U1.104 | v53.21,17.27 arc-34 54.19,16.98 arc-11 54.46,16.76 U1.141 | v45.21,9.4 arc-27 46.08,8.87 U1.118 | v33.4,27.81 arc41 33.75,26.86 arc4 33.83,26.78 U1.55 | v34.8,13.34 arc-27 34.27,12.47 U1.89 | v31.88,16.13 arc25 31.02,15.58 U1.80 | v35.56,7.62 arc-41 35.14,6.69 34.98,6.53 arc45 C4.2 | v48.77,25.15 arc-33 49.25,26.04 U1.18 | v52.83,12.83 arc-14 53.84,12.95 C3.2 | 43.26,31.36 arc-45 v42.67,31.11 43.36,31.11 | U2.2 63.5,19.17 arc45 63.94,18.1 64.21,17.83 arc-45 C23.2 v66.17,17.4 arc-1 66.17,18.42 LED1.C | U1.12 51.63,24.18 arc-14 51.27,23.89 arc-31 v50.29,23.62 arc-39 50.63,24.58 arc-6 50.74,24.69 U1.14
  Top 0.254: U1.33 43.97,31.36 arc-45 43.37,31.11 43.36,31.11 | U1.34 43.26,31.36 | 43.36,31.11 arc-135 43.26,31.36
  pour Bottom (isolate 0.254, rank 2): -2.54,50.8 72.39,50.8 72.39,-2.54 -2.54,-2.54
  pour Top (no thermals): 43.36,31.11 arc-135 43.26,31.36 arc-45 42.67,31.11
  pour Top (no thermals): 40.51,37.59 arc24 41.44,37.79 41.53,37.59 41.44,37.39 arc24
  pour Top (no thermals): 40.51,40.39 arc24 41.44,40.58 41.53,40.39 41.44,40.19 arc24
  pour Top (no thermals): 40.51,43.18 arc24 41.44,43.38 41.53,43.18 41.44,42.98 arc24
  pour Top (no thermals): 40.51,45.97 arc24 41.44,46.17 41.53,45.97 41.44,45.78 arc24
  pour Top (no thermals): 31.62,45.47 arc24 32.55,45.66 32.64,45.47 32.55,45.27 arc24
  pour Top (no thermals): 31.62,42.67 arc24 32.55,42.87 32.64,42.67 32.55,42.47 arc24
  pour Top (no thermals): 31.62,39.88 arc24 32.55,40.08 32.64,39.88 32.55,39.68 arc24
  pour Top (no thermals): 31.62,37.08 arc24 32.55,37.28 32.64,37.08 32.55,36.89 arc24
  pour Top (no thermals): 24.26,23.37 arc24 23.33,23.17 23.24,23.37 23.33,23.57 arc24
  pour Top (no thermals): 24.25,21.39 arc61 23.37,21.29 23.24,21.46 23.27,21.68 arc-16
  pour Top (no thermals): 24.26,19.05 arc24 23.33,18.85 23.24,19.05 23.33,19.25 arc24
  pour Top (no thermals): 29.46,27.3 arc24 28.54,27.11 28.45,27.3 28.54,27.5 arc24
  pour Top (no thermals): 34.16,32.38 arc24 33.23,32.19 33.15,32.38 33.23,32.58 arc24
  pour Top (no thermals): 25.78,14.61 arc24 24.85,14.41 24.77,14.61 24.85,14.8 arc24
  pour Top (no thermals): 24.77,9.65 arc24 23.84,9.45 23.75,9.65 23.84,9.85 arc24
  pour Top (no thermals): 40.77,34.8 arc24 39.84,34.6 39.75,34.8 39.84,35 arc24
  pour Top (no thermals): 39.76,30.76 arc102 40.57,30.95 40.77,30.86 40.87,30.67 arc-66
  pour Top (no thermals): 57.78,26.42 arc24 58.71,26.61 58.8,26.42 58.71,26.22 arc24
  pour Top (no thermals): 57.78,24 arc24 58.71,24.2 58.8,24 58.71,23.81 arc24
  pour Top (no thermals): 44.58,34.42 arc24 44.77,33.49 44.58,33.4 44.38,33.49 arc24
  pour Top (no thermals): 29.08,8.76 arc24 28.15,8.57 28.07,8.76 28.15,8.96 arc24
  pour Top (no thermals): 30.99,4.83 arc24 30.06,4.63 29.97,4.83 30.06,5.02 arc24
  pour Top (no thermals): 34.54,3.43 arc11 33.59,3.22 33.53,3.43 33.64,3.62 arc37
  pour Top (no thermals): 25.27,3.81 arc24 24.34,3.61 24.26,3.81 24.34,4.01 arc24
  pour Top (no thermals): 52.05,14.92 arc27 51.24,15.42 51.31,15.62 51.5,15.71 arc21
  pour Top (no thermals): 49.64,12.38 arc27 48.83,12.88 48.9,13.08 49.09,13.17 arc21
  pour Top (no thermals): 63.63,10.13 arc21 62.69,9.96 62.61,10.16 62.71,10.35 arc27
  pour Top (no thermals): 65.15,17.4 arc24 66.08,17.6 66.17,17.4 66.08,17.2 arc24
  pour Top (no thermals): 66.16,18.42 arc25 66.36,17.49 66.17,17.4 65.97,17.49 arc23
  pour Top (no thermals): 68.2,24.76 arc24 68,25.69 68.2,25.78 68.4,25.69 arc24
  pour Top (no thermals): 64.82,24.95 arc66 64.95,25.82 65.15,25.91 65.35,25.83 arc-21
  pour Top (no thermals): 59.56,14.1 arc24 59.76,13.17 59.56,13.08 59.37,13.17 arc24
  pour Top (no thermals): 55.12,10.79 arc24 56.05,10.99 56.13,10.79 56.05,10.6 arc24
  pour Top (no thermals): 51.31,7.75 arc24 52.24,7.94 52.32,7.75 52.24,7.55 arc24
  pour Top (no thermals): 53.98,27.94 arc24 53.78,28.87 53.98,28.96 54.17,28.87 arc24
  pour Top (no thermals): 28.62,22.08 arc65 27.76,22.28 27.69,22.48 27.78,22.67 arc-20
  pour Top (no thermals): 53.42,21.76 arc-10 52.54,21.27 52.45,21.46 52.53,21.66 arc56
  pour Top (no thermals): 39.64,7.24 arc54 39.92,8.09 40.13,8.13 40.3,8 arc-8
  pour Top (no thermals): 54.98,29.08 arc38 54.11,28.78 53.98,28.96 54.01,29.17 arc10
  pour Top (no thermals): 54.19,16.98 arc55 53.29,17.07 53.21,17.27 53.3,17.47 arc-9
  pour Top (no thermals): 46.08,8.87 arc50 45.23,9.18 45.21,9.4 45.36,9.56 arc-3
  pour Top (no thermals): 51.27,23.89 arc-7 50.38,23.43 50.29,23.62 50.37,23.82 arc53
  pour Top (no thermals): 33.75,26.86 arc-16 33.2,27.72 33.4,27.81 33.6,27.74 arc62
  pour Top (no thermals): 34.27,12.47 arc49 34.58,13.32 34.8,13.34 34.96,13.19 arc-3
  pour Top (no thermals): 31.02,15.58 arc-1 31.73,16.28 31.88,16.13 31.87,15.91 arc48
  pour Top (no thermals): 35.14,6.69 arc62 35.35,7.56 35.56,7.62 35.75,7.52 arc-17
  pour Top (no thermals): 49.25,26.04 arc55 48.98,25.18 48.77,25.15 48.59,25.27 arc-9
  pour Top (no thermals): 50.63,24.58 arc60 50.49,23.7 50.29,23.62 50.1,23.71 arc-15
  pour Top (no thermals): 53.84,12.95 arc38 52.96,12.66 52.83,12.83 52.87,13.04 arc10
  pour Top (no thermals): 43.26,31.36 arc-5 42.81,30.95 42.67,31.11 42.78,31.3 arc76
  pour Top (no thermals): 43.36,31.11 arc35 42.8,30.94 42.67,31.11 42.8,31.29 arc35
LED_ERR
  Top 0.254: U1.108 38.06,2.82 arc-45 35.84,1.91 R2.1
N$1
  Top 0.254: U1.68 28.96,22.45 arc45 26.75,23.37 C2.1
N$2
  Top 0.254: U1.103 38.66,6.96 arc-45 C4.1
N$3
  Top 0.254: J7.3 19.69,41.91 arc-45 20.77,41.47 arc45 21.84,41.02 32.19,41.02 arc-45 32.96,40.7 arc45 33.72,40.39 R5.2
  pour Top (no thermals): 17.06,41.91 arc38 15.64,41.41 15.24,41.91 15.64,42.41 arc38
N$5
  Top 0.254: J7.1 20.05,46.99 arc-45 20.51,46.8 arc45 20.97,46.61 32.19,46.61 arc-45 32.96,46.29 arc45 33.72,45.97 R3.2
  pour Top (no thermals): 17.06,46.99 arc38 15.64,46.49 15.24,46.99 15.64,47.49 arc38
N$6
  Top 0.254: J8.2 arc31 5.28,43.38 arc21 6.38,43.18 19.96,43.18 arc-45 20.57,42.93 arc45 21.19,42.67 R8.2
  pour Top (no thermals): 5.28,43.38 arc10 3.69,43.83 3.81,44.45 4.44,44.5 arc65
N$7
  Top 0.254: J7.2 19.87,44.45 arc-45 20.64,44.13 arc45 21.4,43.81 32.19,43.81 arc-45 32.96,43.5 arc45 33.72,43.18 R4.2
  pour Top (no thermals): 17.06,44.45 arc38 15.64,43.95 15.24,44.45 15.64,44.95 arc38
N$9
  Top 0.254: U1.140 54.96,15.54 arc-45 55.88,13.33 C3.1
N$10
  Top 0.254: J17.1 63.64,12.73 arc-45 62.91,13.03 arc-45 62.61,13.76 C23.1 | U2.3 64.45,20.29 arc45 64.29,20.67 arc45 63.91,20.83 63.09,20.83 arc45 62.71,20.67 arc45 62.55,20.29 U2.1 62.55,17.46
  Top 0.406: 62.55,17.46 C23.1
N$13
  Top 0.254: J8.3 arc31 5.28,40.84 arc21 6.38,40.64 19.78,40.64 arc-45 20.7,40.26 arc45 21.62,39.88 R9.2
  pour Top (no thermals): 5.28,40.84 arc10 3.69,41.29 3.81,41.91 4.44,41.96 arc65
N$14
  Top 0.254: J7.4 19.51,39.37 arc-45 20.89,38.8 arc45 22.27,38.23 32.19,38.23 arc-45 32.96,37.91 arc45 33.72,37.59 R6.2
  pour Top (no thermals): 17.06,39.37 arc38 15.64,38.87 15.24,39.37 15.64,39.87 arc38
N$15
  Top 0.254: J8.4 9.26,39.37 arc-45 10.79,38.73 arc45 12.33,38.1 19.6,38.1 arc-45 20.83,37.59 arc45 22.05,37.08 R10.2
  pour Top (no thermals): 5.63,39.37 arc38 4.21,38.87 3.81,39.37 4.21,39.87 arc38
N$16
  Top 0.254: J8.1 arc31 5.28,45.92 arc21 6.38,45.72 20.14,45.72 arc-45 20.45,45.59 arc45 20.75,45.47 R7.2
  pour Top (no thermals): 5.28,45.92 arc10 3.69,46.37 3.81,46.99 4.44,47.04 arc65
N$23
  Top 0.254: R2.2 29.11,1.91 arc-45 28.19,2.29 27.81,2.67 LED2.A
N$24
  Top 0.254: LED1.A arc-43 68.33,19.24 68.33,21.28 arc45 R1.2
NRST  (via drill 0.33)
  Top 0.254: v58.8,29.46 arc-44 57.86,29.08 57.78,29.08 | v48.26,30.48 arc26 47.27,30.25 arc19 46.67,29.82 U1.27 | v53.09,30.1 arc-29 54.07,30.35 55.66,30.35 arc-45 57.12,29.75 57.72,29.15 | 57.78,29.08 57.72,29.15 | 57.72,29.15 57.66,29.15 arc45 57.55,29.1 C1.1 57.78,29.08
  Bottom 0.254: v58.8,29.46 60.17,30.83 arc-31 61.61,31.65 arc-14 62.39,31.75 J18.11 | v48.26,30.48 arc14 49.27,30.35 52.1,30.35 arc-29 v53.09,30.1
  pour Bottom (no thermals): 63.99,31.75 arc32 65.19,32.09 65.41,31.75 65.19,31.41 arc32
  pour Bottom (no thermals): 59.52,30.18 arc24 59,29.39 58.8,29.46 58.72,29.67 arc24
  pour Top (no thermals): 57.86,29.08 arc65 58.61,29.56 58.8,29.46 58.87,29.26 arc-20
  pour Bottom (no thermals): 49.27,30.35 arc10 48.3,30.27 48.26,30.48 48.39,30.65 arc38
  pour Top (no thermals): 47.27,30.25 arc-2 48.17,30.68 48.26,30.48 48.18,30.28 arc48
  pour Top (no thermals): 54.07,30.35 arc51 53.25,29.96 53.09,30.1 53.07,30.31 arc-4
  pour Bottom (no thermals): 52.1,30.35 arc-4 53.1,30.31 53.09,30.1 52.92,29.96 arc51
SWCLK  (via drill 0.33)
  Top 0.254: J18.6 arc-92 67.69,34.58 67.69,29.08 arc-14 v67.56,28.07 | v51.44,18.16 arc-29 50.45,17.91 48.67,17.91 arc45 46.45,16.99 42.7,13.24 arc45 41.78,11.02 41.78,8.56 arc-45 40.86,6.34 U1.107
  Bottom 0.254: v67.56,28.07 arc-42 67.51,27.05 arc-21 67.37,26.86 arc-45 66.91,26.67 65.5,26.67 arc45 64.47,26.24 57.56,19.33 arc-45 55.34,18.41 52.42,18.41 arc29 v51.44,18.16
  pour Bottom (no thermals): 67.51,27.05 arc63 67.4,27.93 67.56,28.07 67.78,28.04 arc-18
  pour Top (no thermals): 67.69,34.58 arc111 66.82,35.18 66.67,35.56 66.85,35.92 arc-64
  pour Top (no thermals): 67.69,29.08 arc10 67.78,28.1 67.56,28.07 67.39,28.2 arc38
  pour Bottom (no thermals): 52.42,18.41 arc51 51.6,18.03 51.44,18.16 51.42,18.38 arc-4
  pour Top (no thermals): 50.45,17.91 arc51 51.27,18.3 51.44,18.16 51.45,17.95 arc-4
SWDIO  (via drill 0.33)
  Top 0.254: v66.8,27.43 arc64 67.75,27.07 arc34 68.2,27.3 arc45 68.45,27.92 68.45,34.66 arc42 67.89,36.12 arc35 J18.4 | v50.55,18.67 arc-29 49.56,18.41 48.42,18.41 arc45 46.2,17.5 42.09,13.38 arc45 41.27,11.43 arc-45 40.47,9.47 U1.102
  Bottom 0.254: v50.55,18.67 arc-29 51.53,18.92 55.09,18.92 arc45 57.31,19.84 64.15,26.68 arc-45 65.34,27.18 65.82,27.18 arc29 v66.8,27.43
  pour Top (no thermals): 67.75,27.07 arc-41 66.69,27.25 66.8,27.43 67.01,27.5 arc82
  pour Bottom (no thermals): 51.53,18.92 arc51 50.71,18.53 50.55,18.67 50.53,18.88 arc-4
  pour Bottom (no thermals): 65.82,27.18 arc51 66.63,27.57 66.8,27.43 66.82,27.22 arc-4
  pour Top (no thermals): 49.56,18.41 arc51 50.38,18.8 50.55,18.67 50.56,18.45 arc-4
  pour Top (no thermals): 67.89,36.12 arc63 66.78,36.44 66.67,36.83 66.96,37.11 arc-2
THERM_BED
  Top 0.254: J19.2 arc26 57.7,33.13 arc27 58.04,34.54 58.04,35.37 arc45 57.72,36.13 arc45 56.95,36.45 56.26,36.45 arc-45 54.31,37.26 52.99,38.58 arc-45 52.07,40.8 52.07,44.64 arc45 51.75,45.4 51.7,45.45 arc45 R20.2
  pour Top (no thermals): 57.7,33.13 arc14 57.13,31.61 56.52,31.75 56.5,32.38 arc61
THERM_HOT_END
  Top 0.254: J19.1 51.97,38.83 arc-45 51.05,41.05 R19.2
  pour Top (no thermals): 55.23,35.58 arc38 56.59,34.92 56.52,34.29 55.88,34.22 arc38
TIM1_CH1
  Top 0.254: J9.1 arc-36 16.86,22.42 arc-9 17.32,22.45 17.6,22.45 arc45 19.82,23.37 21.69,25.24 arc-45 23.91,26.16 30.32,26.16 arc-45 32.53,25.24 U1.59
  pour Top (no thermals): 16.86,22.42 arc69 15.86,21.46 15.24,21.59 15.19,22.22 arc5
TIM1_CH2
  Top 0.254: J9.2 arc44 16.93,19.72 arc1 16.97,19.77 21.94,24.73 arc-45 24.16,25.65 29.41,25.65 arc-45 31.63,24.73 U1.61
  pour Top (no thermals): 16.93,19.72 arc-3 15.66,18.57 15.24,19.05 15.58,19.59 arc76
TIM1_CH3
  Top 0.254: J9.3 19.54,20.81 arc45 19.81,21.46 arc-45 20.08,22.11 22.2,24.23 arc-45 24.41,25.15 28.5,25.15 arc-45 30.72,24.23 U1.63
  pour Top (no thermals): 16.53,17.8 arc38 15.87,16.44 15.24,16.51 15.17,17.14 arc38
TIM1_CH4
  Top 0.254: J9.4 19.42,18.15 arc45 20.32,20.32 arc-45 21.22,22.49 22.45,23.72 arc-45 24.67,24.64 28.3,24.64 arc-45 30.52,23.72 U1.64
  pour Top (no thermals): 16.53,15.26 arc38 15.87,13.9 15.24,13.97 15.17,14.6 arc38
TIM2_CH1
  Top 0.254: J10.1 arc-41 16.89,35.05 arc-4 17.08,35.05 36.98,35.05 arc-45 39.2,34.13 U1.37
  pour Top (no thermals): 16.89,35.05 arc73 15.86,34.15 15.24,34.29 15.19,34.92 arc0
TIM2_CH2
  Top 0.254: J10.2 17.11,33.62 arc-45 19.33,34.54 36.78,34.54 arc-45 39,33.62 U1.38
  pour Top (no thermals): 16.53,33.04 arc38 15.87,31.68 15.24,31.75 15.17,32.38 arc38
TIM2_CH3
  Top 0.254: J10.3 19.15,33.12 arc-45 21.37,34.04 36.58,34.04 arc-45 38.8,33.12 U1.39
  pour Top (no thermals): 16.53,30.5 arc38 15.87,29.14 15.24,29.21 15.17,29.84 arc38
TIM2_CH4
  Top 0.254: J10.4 21.18,32.61 arc-45 23.4,33.53 36.38,33.53 arc-45 38.6,32.61 U1.40
  pour Top (no thermals): 16.53,27.96 arc38 15.87,26.6 15.24,26.67 15.17,27.3 arc38
TIM3_CH1
  Top 0.254: J11.1 arc31 16.71,7.82 arc21 17.81,7.62 30.95,7.62 arc45 33.17,8.54 U1.93
  pour Top (no thermals): 16.71,7.82 arc10 15.12,8.27 15.24,8.89 15.87,8.94 arc65
TIM3_CH2
  Top 0.254: J11.2 arc-41 16.89,7.11 arc-4 17.08,7.11 31.15,7.11 arc45 33.37,8.03 U1.94
  pour Top (no thermals): 16.89,7.11 arc73 15.86,6.21 15.24,6.35 15.19,6.98 arc0
TIM3_CH3
  Top 0.254: J11.3 17.11,5.68 arc-45 19.33,6.6 31.35,6.6 arc45 33.56,7.52 U1.95
  pour Top (no thermals): 16.53,5.1 arc38 15.87,3.74 15.24,3.81 15.17,4.44 arc38
TIM3_CH4
  Top 0.254: J11.4 19.15,5.18 arc-45 21.37,6.1 31.55,6.1 arc45 33.76,7.01 U1.96
  pour Top (no thermals): 16.53,2.56 arc38 15.87,1.2 15.24,1.27 15.17,1.9 arc38
USART1_RX  (via drill 0.33)
  Top 0.254: v66.04,28.96 arc-20 65.61,29.57 arc-25 J18.13 | v49.66,19.18 arc-29 48.67,18.92 48.13,18.92 arc45 45.97,18.02 41.1,13.16 arc45 40.77,12.36 arc-45 40.44,11.57 U1.99
  Bottom 0.254: v66.04,28.96 arc-59 65.81,27.97 arc-2 65.79,27.94 arc-45 65.17,27.69 64.96,27.69 arc45 63.98,27.28 57.05,20.35 arc-45 54.83,19.43 50.64,19.43 arc29 v49.66,19.18
  pour Top (no thermals): 65.61,29.57 arc50 66.09,29.16 66.04,28.96 65.83,28.91 arc13
  pour Bottom (no thermals): 65.81,27.97 arc78 65.86,28.83 66.04,28.96 66.25,28.93 arc-36
  pour Top (no thermals): 48.67,18.92 arc51 49.49,19.31 49.66,19.18 49.67,18.96 arc-4
  pour Bottom (no thermals): 50.64,19.43 arc51 49.82,19.04 49.66,19.18 49.64,19.39 arc-4
  pour Top (no thermals): 65.61,29.57 arc25 65.15,30.17 65.41,30.48 65.7,30.21 arc67
USART1_TX  (via drill 0.33)
  Top 0.254: v65.15,28.45 arc56 66.1,28.07 arc39 66.73,28.38 66.74,28.38 arc8 66.84,28.5 arc35 67.06,29.12 arc35 J18.14 | v48.77,19.68 arc-29 47.78,19.43 47.56,19.43 arc45 45.94,18.76 40.61,13.43 arc45 40.26,12.59 arc-45 39.91,11.75 U1.98
  Bottom 0.254: v65.15,28.45 arc6 64.19,28.13 arc24 63.87,27.93 56.8,20.86 arc-45 54.58,19.94 49.75,19.94 arc29 v48.77,19.68
  pour Top (no thermals): 66.1,28.07 arc-32 65.06,28.25 65.15,28.45 65.35,28.53 arc75
  pour Top (no thermals): 67.06,29.12 arc63 66.48,30.13 66.67,30.48 67.08,30.48 arc-2
  pour Bottom (no thermals): 64.18,28.13 arc18 65.01,28.62 65.15,28.45 65.12,28.23 arc30
  pour Top (no thermals): 47.78,19.43 arc51 48.6,19.82 48.77,19.68 48.78,19.47 arc-4
  pour Bottom (no thermals): 49.75,19.94 arc51 48.94,19.55 48.77,19.68 48.75,19.9 arc-4
USB_HS_DM
  Top 0.254: U1.74 31.86,20.67 arc-45 34.08,21.59 49.5,21.59 arc-45 51.72,20.67 52.17,20.22 arc45 54.39,19.3 59.08,19.3 arc-45 60.77,18.61 arc-45 61.47,16.92 61.47,13.57 arc45 61.91,12.52 arc45 62.96,12.08 J17.2
USB_HS_DP
  Top 0.254: U1.75 32.06,20.16 arc-45 34.28,21.08 49.25,21.08 arc-45 51.47,20.16 51.91,19.71 arc45 54.13,18.8 59.01,18.8 arc-45 60.39,18.22 arc-45 60.96,16.84 60.96,13.6 arc45 61.59,12.06 arc45 63.13,11.43 J17.3
X2_STOP
  Top 0.254: J1.2 9.75,25.81 arc45 11.97,24.89 15.46,24.89 arc45 17.68,25.81 21.69,29.82 arc-45 23.91,30.73 34.23,30.73 arc-45 36.45,29.82 U1.47
  pour Top (no thermals): 5.1,30.46 arc38 3.74,31.12 3.81,31.75 4.44,31.82 arc38
X_STOP
  Top 0.254: J1.1 7.26,30.84 arc-45 7.62,29.97 arc45 7.98,29.11 10.77,26.32 arc45 12.98,25.4 15.21,25.4 arc45 17.43,26.32 21.43,30.32 arc-45 23.65,31.24 34.43,31.24 arc-45 36.65,30.32 U1.46
  pour Top (no thermals): 5.1,33 arc38 3.74,33.66 3.81,34.29 4.44,34.36 arc38
Y2_STOP
  Top 0.254: J1.4 5.68,24.8 arc45 7.9,23.88 15.97,23.88 arc45 18.19,24.8 22.2,28.8 arc-45 24.41,29.72 33.83,29.72 arc-45 36.05,28.8 U1.49
  pour Top (no thermals): 5.1,25.38 arc38 3.74,26.04 3.81,26.67 4.44,26.74 arc38
Y_STOP
  Top 0.254: J1.3 7.72,25.3 arc45 9.94,24.38 15.72,24.38 arc45 17.94,25.3 21.94,29.31 arc-45 24.16,30.23 34.03,30.23 arc-45 36.25,29.31 U1.48
  pour Top (no thermals): 5.1,27.92 arc38 3.74,28.58 3.81,29.21 4.44,29.28 arc38
Z2_STOP
  Top 0.254: J2.2 6.7,21.94 arc-45 8.92,22.86 16.61,22.86 arc45 18.83,23.78 22.83,27.78 arc-45 25.05,28.7 33.96,28.7 arc-45 35.28,28.16 U1.51
  pour Top (no thermals): 5.1,20.34 arc38 4.44,18.98 3.81,19.05 3.74,19.68 arc38
Z_STOP
  Top 0.254: J2.1 arc-18 5.14,22.83 arc-34 6.89,23.37 16.23,23.37 arc45 18.45,24.29 22.45,28.29 arc-45 24.67,29.21 33.89,29.21 arc-45 35.67,28.47 U1.50
  pour Top (no thermals): 5.14,22.83 arc55 4.44,21.57 3.81,21.59 3.68,22.21 arc22

## Text on the board
tPlace: ADC1 | ADC5 | DBG0 | ADC2 | ADC6 | DBG1 | ADC3 | ADC7 | DBG2 | ADC4 | ADC8 | DBG3 | X | X_STEP | HOTEND / THERM | X2 | X_DIR | BED / THERM | ENDSTOPS | Y | Y_STEP | Y2 | Y_DIR | Z | Z_STEP | Z2 | Z_DIR | ENDSTOPS | 3V3 | E | E_STEP | E2 | E_DIR | E3 | E2_STEP | E4 | E2_DIR | TIM KOSTKA / 2019-DEC-31 | ENDSTOPS | E5 | E3_STEP | ERR | CERT3D REV2 | E6 | E3_DIR